# Altium PCB BAILEY.PcbDoc (part 4 of 8)
Units mil, origin at the board's own origin, x right, y up, seen from the top; angles counter-clockwise.
Board outline 4500 x 4000 mil, 4 copper layers (Signal Layer 1, Signal Layer 2, Signal Layer 3, Signal Layer 4), stack 59.904 mil thick; 190 components, 117 nets, 664 pads, 291 vias.
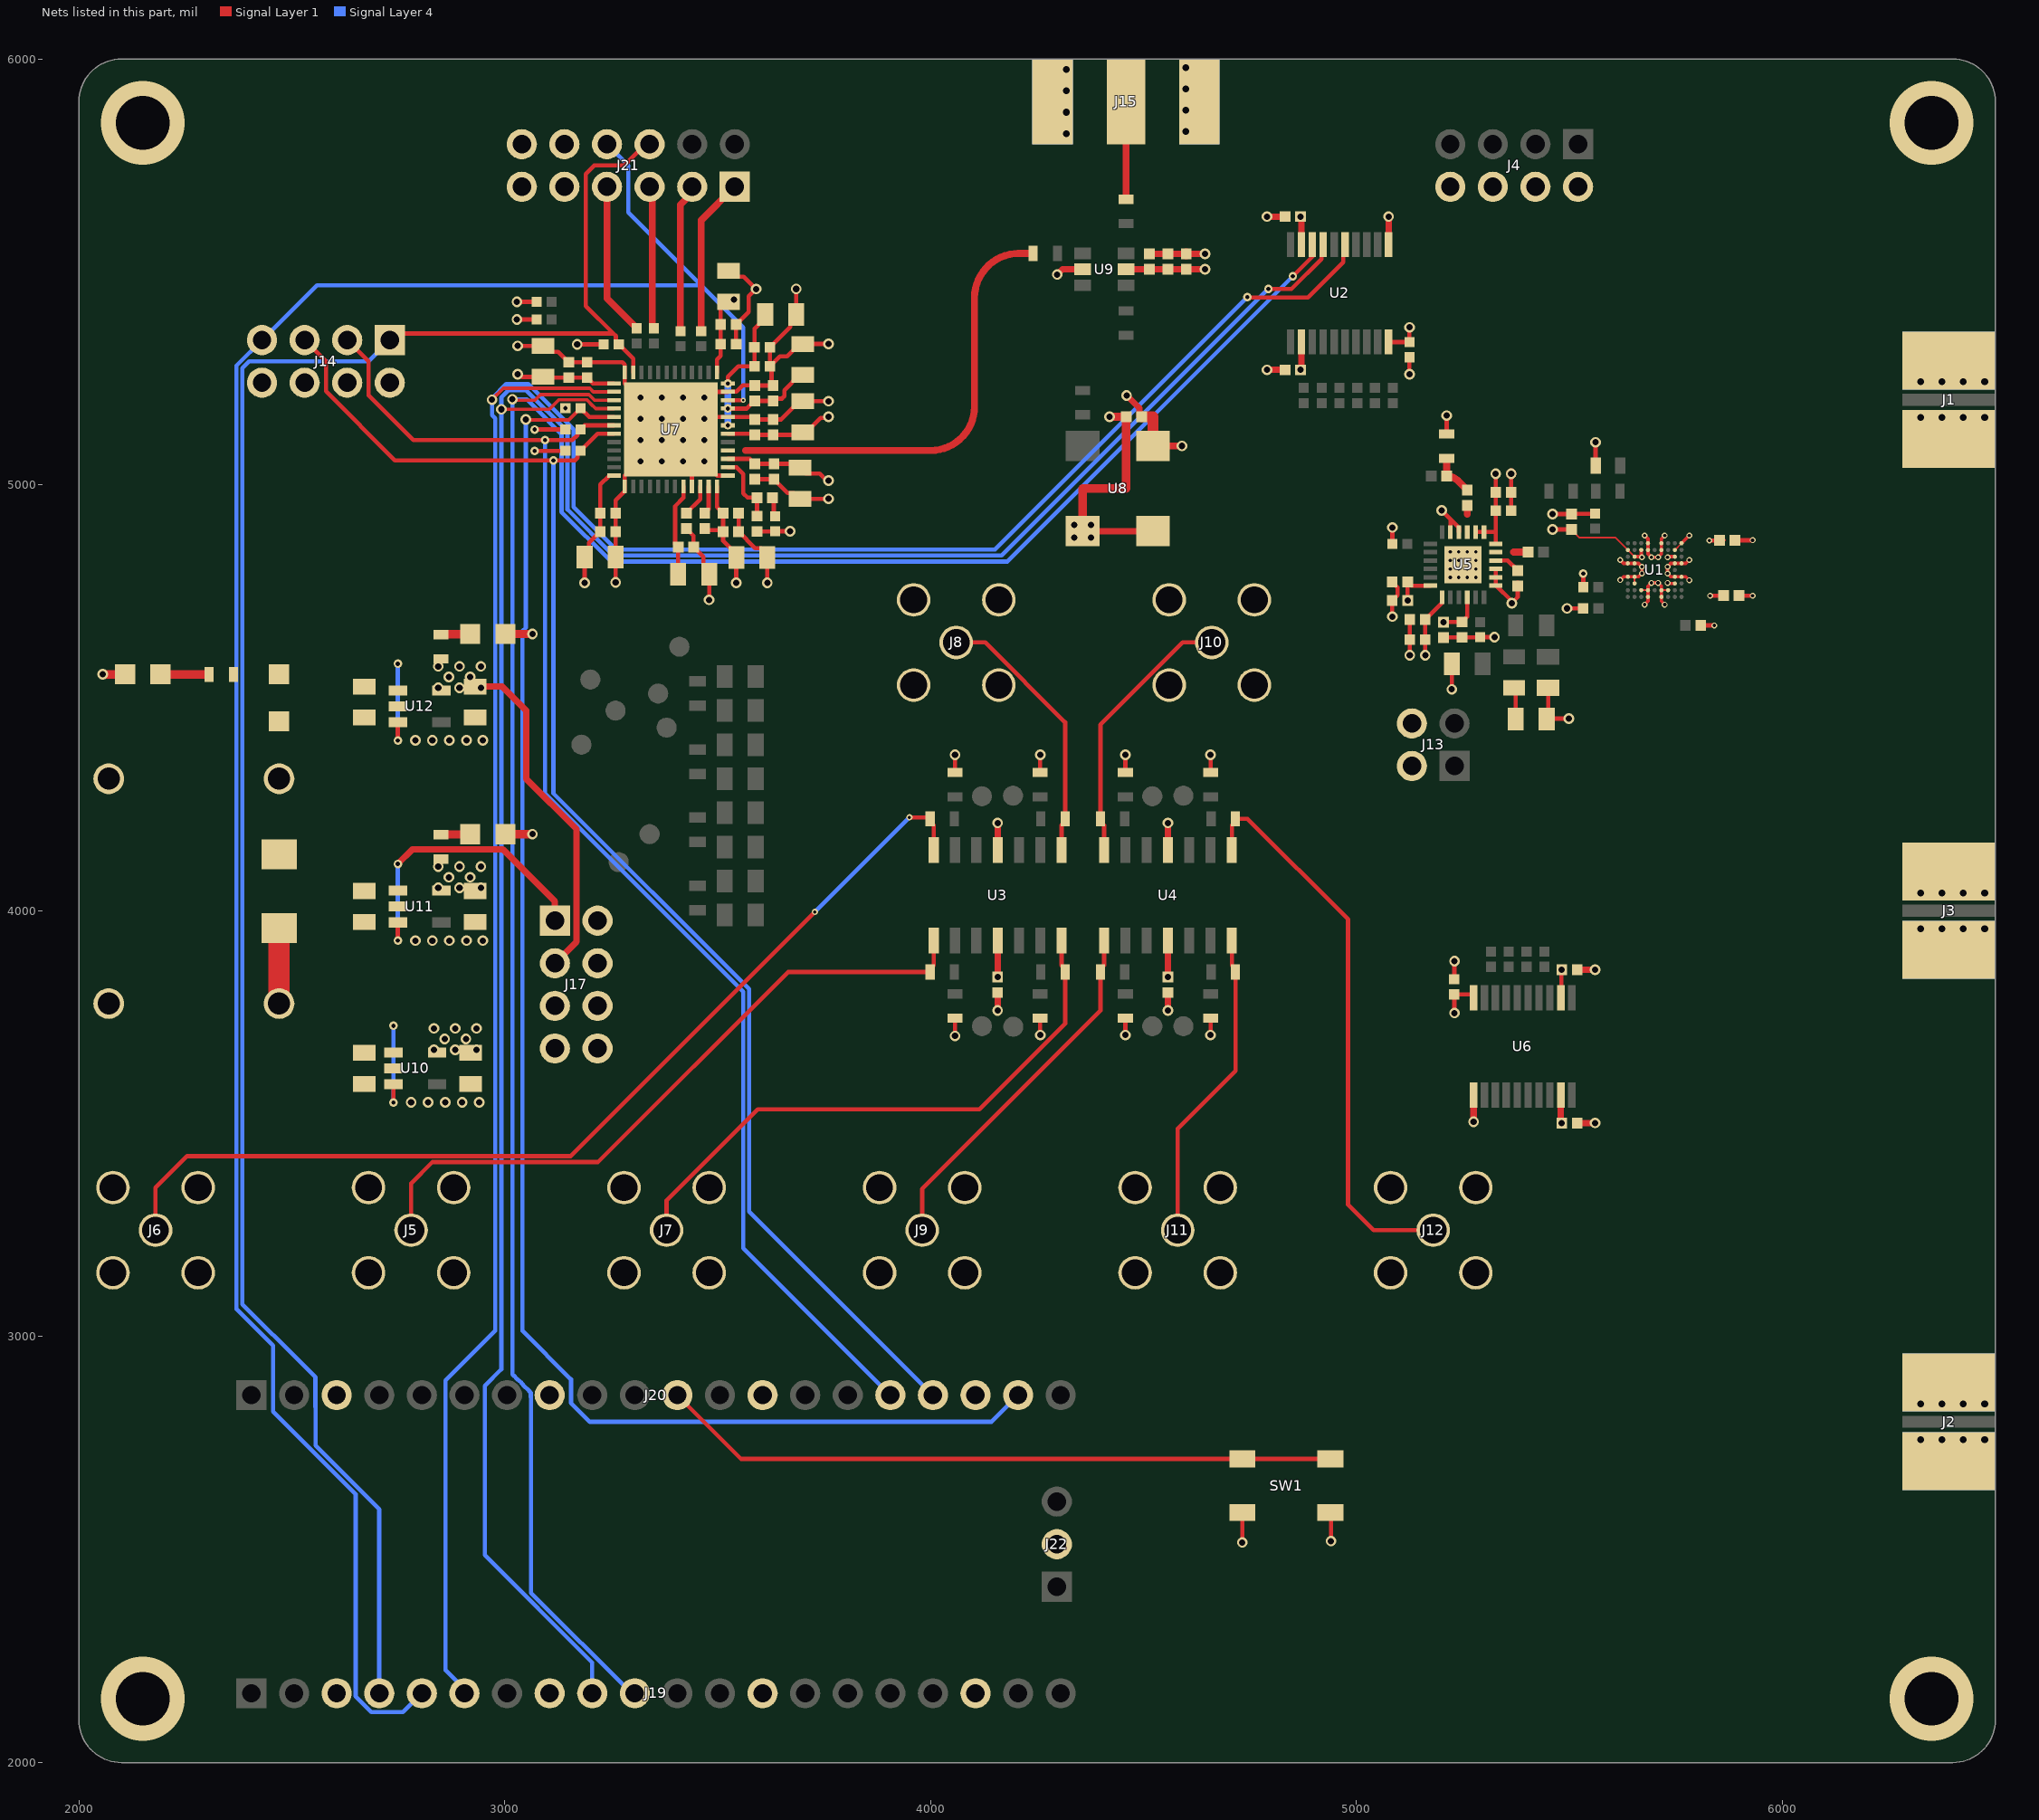
[diagram p4: the nets of this part, all layers, seen from the top]

## Part data (continued)
J21: library part CONN_2x6_2.54mm_PinHeader_Horizontal, "Conn Unshrouded Header HDR 12 POS 2.54mm Solder RA Top Entry Thru-Hole Bag", Contact Resistance=20mΩ, Current Rating=3A, Insulation Resistance=5GΩ, Manufacturer="Adam Tech", Manufacturer Part Number=PH2RA-12-UA, Max Operating Temperature=105°C, Min Operating Temperature=-40°C, Supplier Part Number=2057-PH2RA-12-UA-ND, Category="Card Edge Connectors", ComponentLink1Description=https://datasheet.octopart.com:443/PH2RA-12-UA-Adam-Tech-datasheet-21182894.pdf?src-supplier=IHS, ComponentLink1URL=https://datasheet.octopart.com:443/PH2RA-12-UA-Adam-Tech-datasheet-21182894.pdf?src-supplier=IHS, ComponentLink2Description=http://sigma.octopart.com:80/reach_statement/Adam-Tech-company-23.pdf?src-supplier=Compliance+Statements, ComponentLink2URL=http://sigma.octopart.com:80/reach_statement/Adam-Tech-company-23.pdf?src-supplier=Compliance+Statements, ComponentLink3Description=http://sigma.octopart.com:80/rohs_statement/Adam-Tech-company-22.pdf?src-supplier=Compliance+Statements, ComponentLink3URL=http://sigma.octopart.com:80/rohs_statement/Adam-Tech-company-22.pdf?src-supplier=Compliance+Statements, Contact Gender=Male, Contact Material=Brass, Export Control Classification Number (ECCN) Code=EAR99, Harmonized Tariff Schedule (HTS) Code=8536.69.40.40, Introduction Date=2012-01-13, Lifecycle Status=Production, Number of Rows=2, Pins=12, Pricing="1=0.27, 10=0.229, 100=0.1945, 500=0.17358, 1000=0.16528, 5000=0.14753, 10000=0.14049 (USD)", REACH SVHC=Yes, RoHS=Compliant, Row Spacing=2.54mm, Schedule B="8536694040, 8536694040|8536694040|8536694040|8536694040|8536694040", Stock=5214, Supplier=DigiKey, Terminal Pitch=2.54mm
J22: library part CONN_1x3_2.54mm_PinSocket_Vertical, "Btb Conn, Rcpt, 3Pos, 1Row, 2.54Mm Rohs Compliant: Yes", Contact Resistance=20mΩ, Current Rating=3A, Insulation Resistance=1GΩ, Manufacturer="Wurth Elektronik", Manufacturer Part Number=61300311821, Max Operating Temperature=105°C, Min Operating Temperature=-40°C, Operating Supply Voltage=250V, Supplier Part Number=732-61300311821-ND, Category=Uncategorized, ComponentLink1Description=https://datasheet.octopart.com:443/61300311821-Wurth-Elektronik-datasheet-182028583.pdf?src-supplier=Wurth+Elektronik, ComponentLink1URL=https://datasheet.octopart.com:443/61300311821-Wurth-Elektronik-datasheet-182028583.pdf?src-supplier=Wurth+Elektronik, ComponentLink2Description=https://datasheet.octopart.com:443/61300311821-W%C3%BCrth-Elektronik-datasheet-62127820.pdf?src-supplier=Wurth+Elektronik, ComponentLink2URL=https://datasheet.octopart.com:443/61300311821-W%C3%BCrth-Elektronik-datasheet-62127820.pdf?src-supplier=Wurth+Elektronik, Contact Plating=Gold, Gender=Female, Insulation Material=PBT, Lead Pitch=2.54mm, Length=8.12mm, Orientation=Vertical, Pins=3, Pitch=2.54mm, Pricing="1=0.32, 10=0.303, 100=0.2916, 250=0.27992, 500=0.2673 (USD)", RoHS=Compliant, Stock=1715, Supplier=DigiKey
R1 R2 R28 R41 R42 R43 R44 R46: library part RES, "Res Thick Film 0402 10K Ohm 1% 0.063W(1/16W) ±100ppm/C Pad SMD T/R", Case Code (Imperial)=0402, Manufacturer=Yageo, Manufacturer Part Number=RC0402FR-0710KL, Max Operating Temperature=155°C, Min Operating Temperature=-55°C, Power Dissipation=62.5mW, Power Rating=63mW, Supplier Part Number=311-10.0KLRCT-ND, Temperature Coefficient=100ppm/°C, Tolerance=1%, Voltage Rating=50V, Case Code (Metric)=0402, Case/Package=0402, Category="Chip SMD Resistors", China RoHS=Non-Compliant, ComponentLink1Description=https://datasheet.octopart.com:443/RC0402FR-0710KL-Yageo-datasheet-175887523.pdf?src-supplier=Newark, ComponentLink1URL=https://datasheet.octopart.com:443/RC0402FR-0710KL-Yageo-datasheet-175887523.pdf?src-supplier=Newark, ComponentLink2Description=https://datasheet.octopart.com:443/RC0402FR-0710KL-Yageo-datasheet-12531192.pdf?src-supplier=Newark, ComponentLink2URL=https://datasheet.octopart.com:443/RC0402FR-0710KL-Yageo-datasheet-12531192.pdf?src-supplier=Newark, ComponentLink3Description=https://datasheet.octopart.com:443/RC0402FR-0710KL-Yageo-datasheet-8324527.pdf?src-supplier=Newark, ComponentLink3URL=https://datasheet.octopart.com:443/RC0402FR-0710KL-Yageo-datasheet-8324527.pdf?src-supplier=Newark, ComponentLink4Description=https://datasheet.octopart.com:443/RC0402FR-0710KL-Yageo-datasheet-10408619.pdf?src-supplier=element14+APAC, ComponentLink4URL=https://datasheet.octopart.com:443/RC0402FR-0710KL-Yageo-datasheet-10408619.pdf?src-supplier=element14+APAC, ComponentLink5Description=https://datasheet.octopart.com:443/RC0402FR-0710KL-Yageo-datasheet-62067350.pdf?src-supplier=element14+APAC, ComponentLink5URL=https://datasheet.octopart.com:443/RC0402FR-0710KL-Yageo-datasheet-62067350.pdf?src-supplier=element14+APAC, ComponentLink6Description=https://datasheet.octopart.com:443/RC0402FR-0710KL-Yageo-datasheet-21426659.pdf?src-supplier=element14+APAC, ComponentLink6URL=https://datasheet.octopart.com:443/RC0402FR-0710KL-Yageo-datasheet-21426659.pdf?src-supplier=element14+APAC, ComponentLink7Description=https://datasheet.octopart.com:443/RC0402FR-0710KL-Yageo-datasheet-164759695.pdf?src-supplier=Upverter, ComponentLink7URL=https://datasheet.octopart.com:443/RC0402FR-0710KL-Yageo-datasheet-164759695.pdf?src-supplier=Upverter, ComponentLink8Description=https://datasheet.octopart.com:443/RC0402FR-0710KL-Yageo-datasheet-103092701.pdf?src-supplier=Upverter, ComponentLink8URL=https://datasheet.octopart.com:443/RC0402FR-0710KL-Yageo-datasheet-103092701.pdf?src-supplier=Upverter, ComponentLink9Description=https://sigma.octopart.com:443/138820526/technical_drawing/Yageo-RC0402FR-0710KL.pdf?src-supplier=Upverter, ComponentLink9URL=https://sigma.octopart.com:443/138820526/technical_drawing/Yageo-RC0402FR-0710KL.pdf?src-supplier=Upverter, ComponentLink10Description=https://datasheet.octopart.com:443/RC0402FR-0710KL-Yageo-datasheet-98239111.pdf?src-supplier=Upverter, ComponentLink10URL=https://datasheet.octopart.com:443/RC0402FR-0710KL-Yageo-datasheet-98239111.pdf?src-supplier=Upverter, ComponentLink11Description=https://datasheet.octopart.com:443/RC0402FR-0710KL-Yageo-datasheet-68298067.pdf?src-supplier=Upverter, ComponentLink11URL=https://datasheet.octopart.com:443/RC0402FR-0710KL-Yageo-datasheet-68298067.pdf?src-supplier=Upverter, ComponentLink12Description=https://datasheet.octopart.com:443/RC0402FR-0710KL-Yageo-datasheet-68297981.pdf?src-supplier=Upverter, ComponentLink12URL=https://datasheet.octopart.com:443/RC0402FR-0710KL-Yageo-datasheet-68297981.pdf?src-supplier=Upverter, ComponentLink13Description=https://datasheet.octopart.com:443/RC0402FR-0710KL-Yageo-datasheet-141435361.pdf?src-supplier=Upverter, ComponentLink13URL=https://datasheet.octopart.com:443/RC0402FR-0710KL-Yageo-datasheet-141435361.pdf?src-supplier=Upverter, ComponentLink14Description=https://datasheet.octopart.com:443/RC0402FR-0710KL-Yageo-datasheet-12509768.pdf?src-supplier=Upverter, ComponentLink14URL=https://datasheet.octopart.com:443/RC0402FR-0710KL-Yageo-datasheet-12509768.pdf?src-supplier=Upverter, ComponentLink15Description=https://datasheet.octopart.com:443/RC0402FR-0710KL-Yageo-Group-datasheet-190305687.pdf?src-supplier=Future+Electronics, ComponentLink15URL=https://datasheet.octopart.com:443/RC0402FR-0710KL-Yageo-Group-datasheet-190305687.pdf?src-supplier=Future+Electronics, ComponentLink16Description=https://datasheet.octopart.com:443/RC0402FR-0710KL-Yageo-datasheet-137700087.pdf?src-supplier=Future+Electronics, ComponentLink16URL=https://datasheet.octopart.com:443/RC0402FR-0710KL-Yageo-datasheet-137700087.pdf?src-supplier=Future+Electronics, ComponentLink17Description=https://datasheet.octopart.com:443/RC0402FR-0710KL-Yageo-datasheet-8324255.pdf?src-supplier=Future+Electronics, ComponentLink17URL=https://datasheet.octopart.com:443/RC0402FR-0710KL-Yageo-datasheet-8324255.pdf?src-supplier=Future+Electronics, ComponentLink18Description=https://datasheet.octopart.com:443/RC0402FR-0710KL-Yageo-datasheet-8329306.pdf?src-supplier=element14, ComponentLink18URL=https://datasheet.octopart.com:443/RC0402FR-0710KL-Yageo-datasheet-8329306.pdf?src-supplier=element14, ComponentLink19Description=https://datasheet.octopart.com:443/RC0402FR-0710KL-Yageo-datasheet-505231.pdf?src-supplier=element14, ComponentLink19URL=https://datasheet.octopart.com:443/RC0402FR-0710KL-Yageo-datasheet-505231.pdf?src-supplier=element14, ComponentLink20Description=https://datasheet.octopart.com:443/RC0402FR-0710KL-Yageo-datasheet-175423674.pdf?src-supplier=SOS+electronic, ComponentLink20URL=https://datasheet.octopart.com:443/RC0402FR-0710KL-Yageo-datasheet-175423674.pdf?src-supplier=SOS+electronic, ComponentLink21Description=https://datasheet.octopart.com:443/RC0402FR-0710KL-Yageo-datasheet-79472498.pdf?src-supplier=Megastar, ComponentLink21URL=https://datasheet.octopart.com:443/RC0402FR-0710KL-Yageo-datasheet-79472498.pdf?src-supplier=Megastar, ComponentLink22Description=https://datasheet.octopart.com/RC0402FR-0710KL-Yageo-datasheet-73766026.pdf, ComponentLink22URL=https://datasheet.octopart.com/RC0402FR-0710KL-Yageo-datasheet-73766026.pdf, ComponentLink23Description=http://sigma.octopart.com:80/conflict_mineral_statement/Yageo-company-3.pdf?src-supplier=Compliance+Statements, ComponentLink23URL=http://sigma.octopart.com:80/conflict_mineral_statement/Yageo-company-3.pdf?src-supplier=Compliance+Statements, ComponentLink24Description=http://sigma.octopart.com:80/rohs_statement/Yageo-company-2.pdf?src-supplier=Compliance+Statements, ComponentLink24URL=http://sigma.octopart.com:80/rohs_statement/Yageo-company-2.pdf?src-supplier=Compliance+Statements, Composition="Thick Film", Country of Origin="Mainland China, Taiwan", Depth=500µm, Export Control Classification Number (ECCN) Code=EAR99, Harmonized Tariff Schedule (HTS) Code=8533.21.00.30, Height=350µm, Introduction Date=2004-10-04, Lead Free="Lead Free", Lead Pitch=200µm, Length=1mm, Lifecycle Status=Production, Military Standard=Not, Mounting Technology="Surface Mount", Number of Terminals=2, Number of Terminations=2, Package Size=0402, Packaging="Tape & Reel", Pins=2, Pricing="1=0.1, 10=0.012, 25=0.0092, 50=0.0062, 100=0.0056, 250=0.00472, 500=0.00328, 10000=0.00204, 20000=0.00153 (USD)", REACH SVHC=Yes, RoHS=Compliant, Schedule B="8533210045, 8533210045|8533210045|8533210045|8533210045|8533210045|8533210045|8533210045|8533210045|8533210045|8533210045|8533210045|8533210045|8533210045|8533210045, 8533210045|8533210045|8533210045|8533210045|8533210045|8533210045|8533210045|8533210045|8533210045|8533210045|8533210045|8533210045|8533210045|8533210045|8533210045, 8533210045|8533210045|8533210045|8533210045|8533210045|8533210045|8533210045|8533210045|8533210045|8533210045|8533210045|8533210045|8533210045|8533210045|8533210045|8533210045", Stock=9059080, Supplier=DigiKey, Termination=SMD/SMT, Voltage Rating (DC)=50V, Width=500µm, Working Voltage=50V
R3: library part RES, "GENERAL PURPOSE CHIP RESISTOR Metal Glaze/thick Film, 0.1W, 0ohm, Surface Mount, 0603", Case Code (Imperial)=0603, Manufacturer=Yageo, Manufacturer Part Number=RC0603JR-070RL, Max Operating Temperature=155°C, Min Operating Temperature=-55°C, Power Dissipation=100mW, Supplier Part Number=311-0.0GRCT-ND, Temperature Coefficient=200ppm/°C, Voltage Rating (DC)=50V, Case/Package=0603, Category="Chip SMD Resistors", China RoHS=Non-Compliant, ComponentLink1Description=https://datasheet.octopart.com:443/RC0603JR-070RL-Yageo-datasheet-182189538.pdf?src-supplier=IHS, ComponentLink1URL=https://datasheet.octopart.com:443/RC0603JR-070RL-Yageo-datasheet-182189538.pdf?src-supplier=IHS, ComponentLink2Description=https://datasheet.octopart.com:443/RC0603JR-070RL-Yageo-datasheet-8328172.pdf?src-supplier=element14+APAC, ComponentLink2URL=https://datasheet.octopart.com:443/RC0603JR-070RL-Yageo-datasheet-8328172.pdf?src-supplier=element14+APAC, ComponentLink3Description=https://datasheet.octopart.com:443/RC0603JR-070RL-Yageo-datasheet-17842380.pdf?src-supplier=element14+APAC, ComponentLink3URL=https://datasheet.octopart.com:443/RC0603JR-070RL-Yageo-datasheet-17842380.pdf?src-supplier=element14+APAC, ComponentLink4Description=https://datasheet.octopart.com:443/RC0603JR-070RL-Yageo-Group-datasheet-190305687.pdf?src-supplier=Newark, ComponentLink4URL=https://datasheet.octopart.com:443/RC0603JR-070RL-Yageo-Group-datasheet-190305687.pdf?src-supplier=Newark, ComponentLink5Description=https://datasheet.octopart.com:443/RC0603JR-070RL-Yageo-datasheet-12596169.pdf?src-supplier=Newark, ComponentLink5URL=https://datasheet.octopart.com:443/RC0603JR-070RL-Yageo-datasheet-12596169.pdf?src-supplier=Newark, ComponentLink6Description=https://datasheet.octopart.com:443/RC0603JR-070RL-Yageo-datasheet-34211833.pdf?src-supplier=Newark, ComponentLink6URL=https://datasheet.octopart.com:443/RC0603JR-070RL-Yageo-datasheet-34211833.pdf?src-supplier=Newark, ComponentLink7Description=https://datasheet.octopart.com:443/RC0603JR-070RL-Yageo-datasheet-62067350.pdf?src-supplier=Farnell, ComponentLink7URL=https://datasheet.octopart.com:443/RC0603JR-070RL-Yageo-datasheet-62067350.pdf?src-supplier=Farnell, ComponentLink8Description=https://datasheet.octopart.com:443/RC0603JR-070RL-Yageo-datasheet-15599030.pdf?src-supplier=Future+Electronics, ComponentLink8URL=https://datasheet.octopart.com:443/RC0603JR-070RL-Yageo-datasheet-15599030.pdf?src-supplier=Future+Electronics, ComponentLink9Description=https://datasheet.octopart.com:443/RC0603JR-070RL-Yageo-Group-datasheet-176638170.pdf?src-supplier=Future+Electronics, ComponentLink9URL=https://datasheet.octopart.com:443/RC0603JR-070RL-Yageo-Group-datasheet-176638170.pdf?src-supplier=Future+Electronics, ComponentLink10Description=https://datasheet.octopart.com:443/RC0603JR-070RL-Yageo-datasheet-164759695.pdf?src-supplier=Future+Electronics, ComponentLink10URL=https://datasheet.octopart.com:443/RC0603JR-070RL-Yageo-datasheet-164759695.pdf?src-supplier=Future+Electronics, ComponentLink11Description=https://datasheet.octopart.com:443/RC0603JR-070RL-Yageo-datasheet-137700087.pdf?src-supplier=Future+Electronics, ComponentLink11URL=https://datasheet.octopart.com:443/RC0603JR-070RL-Yageo-datasheet-137700087.pdf?src-supplier=Future+Electronics, ComponentLink12Description=https://datasheet.octopart.com:443/RC0603JR-070RL-Yageo-datasheet-27584510.pdf?src-supplier=Future+Electronics, ComponentLink12URL=https://datasheet.octopart.com:443/RC0603JR-070RL-Yageo-datasheet-27584510.pdf?src-supplier=Future+Electronics, ComponentLink13Description=https://datasheet.octopart.com:443/RC0603JR-070RL-Yageo-datasheet-503470.pdf?src-supplier=Future+Electronics, ComponentLink13URL=https://datasheet.octopart.com:443/RC0603JR-070RL-Yageo-datasheet-503470.pdf?src-supplier=Future+Electronics, ComponentLink14Description=https://datasheet.octopart.com:443/RC0603JR-070RL-Yageo-datasheet-79472498.pdf?src-supplier=Megastar, ComponentLink14URL=https://datasheet.octopart.com:443/RC0603JR-070RL-Yageo-datasheet-79472498.pdf?src-supplier=Megastar, ComponentLink15Description=https://datasheet.octopart.com/RC0603JR-070RL-Yageo-datasheet-73766026.pdf, ComponentLink15URL=https://datasheet.octopart.com/RC0603JR-070RL-Yageo-datasheet-73766026.pdf, ComponentLink16Description=https://datasheet.octopart.com:443/RC0603JR-070RL-Yageo-datasheet-5393049.pdf?src-supplier=element14, ComponentLink16URL=https://datasheet.octopart.com:443/RC0603JR-070RL-Yageo-datasheet-5393049.pdf?src-supplier=element14, ComponentLink17Description=https://datasheet.octopart.com:443/RC0603JR-070RL-Yageo-datasheet-118562.pdf?src-supplier=DigiKey, ComponentLink17URL=https://datasheet.octopart.com:443/RC0603JR-070RL-Yageo-datasheet-118562.pdf?src-supplier=DigiKey, ComponentLink18Description=http://sigma.octopart.com:80/conflict_mineral_statement/Yageo-company-3.pdf?src-supplier=Compliance+Statements, ComponentLink18URL=http://sigma.octopart.com:80/conflict_mineral_statement/Yageo-company-3.pdf?src-supplier=Compliance+Statements, ComponentLink19Description=http://sigma.octopart.com:80/rohs_statement/Yageo-company-2.pdf?src-supplier=Compliance+Statements, ComponentLink19URL=http://sigma.octopart.com:80/rohs_statement/Yageo-company-2.pdf?src-supplier=Compliance+Statements, Composition="Thick Film", Contact Plating=Tin, Country of Origin="Mainland China, Taiwan", Depth=800µm, Export Control Classification Number (ECCN) Code=EAR99, Harmonized Tariff Schedule (HTS) Code=8533.21.00.30, Height=450µm, Introduction Date=2001-06-08, Lead Free="Lead Free", Length=1.6mm, Lifecycle Status=Production, Military Standard=Not, Mounting Technology="Surface Mount", Number of Terminals=2, Package Size=0603, Packaging="Cut Tape", Pins=2, Power Rating=100mW, Pricing="1=0.1, 10=0.010, 25=0.008, 50=0.0068, 100=0.0059, 250=0.00496, 500=0.00436, 1000=0.00384 (USD)", Radiation Hardening=No, REACH SVHC=Yes, RoHS=Compliant, Stock=4611171, Supplier=DigiKey, Termination=SMD/SMT, Width=800µm
R4 R14 R15 R16 R17 R22 R23 R24 R25: library part RES, "Resistor SMD Generic", Package Size=0603
R5 R6 R7 R8 R9 R10 R33 R34 R35 R36: library part RES, "Res Thick Film 0402 100 Ohm 1% 0.063W(1/16W) ±100ppm/C Pad SMD T/R", Case Code (Imperial)=0402, Manufacturer=Yageo, Manufacturer Part Number=RC0402FR-07100RL, Max Operating Temperature=155°C, Min Operating Temperature=-55°C, Power Dissipation=62.5mW, Power Rating=63mW, Supplier Part Number=311-100LRCT-ND, Temperature Coefficient=100ppm/°C, Tolerance=1%, Voltage Rating=50V, Case/Package=0402, Category="Chip SMD Resistors", China RoHS=Non-Compliant, ComponentLink1Description=https://datasheet.octopart.com:443/RC0402FR-07100RL-Yageo-datasheet-175887523.pdf?src-supplier=Newark, ComponentLink1URL=https://datasheet.octopart.com:443/RC0402FR-07100RL-Yageo-datasheet-175887523.pdf?src-supplier=Newark, ComponentLink2Description=https://datasheet.octopart.com:443/RC0402FR-07100RL-Yageo-datasheet-8324527.pdf?src-supplier=Newark, ComponentLink2URL=https://datasheet.octopart.com:443/RC0402FR-07100RL-Yageo-datasheet-8324527.pdf?src-supplier=Newark, ComponentLink3Description=https://datasheet.octopart.com:443/RC0402FR-07100RL-Yageo-datasheet-12531192.pdf?src-supplier=Newark, ComponentLink3URL=https://datasheet.octopart.com:443/RC0402FR-07100RL-Yageo-datasheet-12531192.pdf?src-supplier=Newark, ComponentLink4Description=https://datasheet.octopart.com:443/RC0402FR-07100RL-Yageo-datasheet-103092701.pdf?src-supplier=Upverter, ComponentLink4URL=https://datasheet.octopart.com:443/RC0402FR-07100RL-Yageo-datasheet-103092701.pdf?src-supplier=Upverter, ComponentLink5Description=https://datasheet.octopart.com:443/RC0402FR-07100RL-Yageo-Group-datasheet-190305687.pdf?src-supplier=Future+Electronics, ComponentLink5URL=https://datasheet.octopart.com:443/RC0402FR-07100RL-Yageo-Group-datasheet-190305687.pdf?src-supplier=Future+Electronics, ComponentLink6Description=https://datasheet.octopart.com:443/RC0402FR-07100RL-Yageo-datasheet-164759695.pdf?src-supplier=Future+Electronics, ComponentLink6URL=https://datasheet.octopart.com:443/RC0402FR-07100RL-Yageo-datasheet-164759695.pdf?src-supplier=Future+Electronics, ComponentLink7Description=https://datasheet.octopart.com:443/RC0402FR-07100RL-Yageo-datasheet-137700087.pdf?src-supplier=Future+Electronics, ComponentLink7URL=https://datasheet.octopart.com:443/RC0402FR-07100RL-Yageo-datasheet-137700087.pdf?src-supplier=Future+Electronics, ComponentLink8Description=https://datasheet.octopart.com:443/RC0402FR-07100RL-Yageo-datasheet-8324255.pdf?src-supplier=Future+Electronics, ComponentLink8URL=https://datasheet.octopart.com:443/RC0402FR-07100RL-Yageo-datasheet-8324255.pdf?src-supplier=Future+Electronics, ComponentLink9Description=https://datasheet.octopart.com:443/RC0402FR-07100RL-Yageo-datasheet-10408619.pdf?src-supplier=element14+APAC, ComponentLink9URL=https://datasheet.octopart.com:443/RC0402FR-07100RL-Yageo-datasheet-10408619.pdf?src-supplier=element14+APAC, ComponentLink10Description=https://datasheet.octopart.com:443/RC0402FR-07100RL-Yageo-datasheet-21426659.pdf?src-supplier=element14+APAC, ComponentLink10URL=https://datasheet.octopart.com:443/RC0402FR-07100RL-Yageo-datasheet-21426659.pdf?src-supplier=element14+APAC, ComponentLink11Description=https://datasheet.octopart.com:443/RC0402FR-07100RL-Yageo-datasheet-62067350.pdf?src-supplier=Farnell, ComponentLink11URL=https://datasheet.octopart.com:443/RC0402FR-07100RL-Yageo-datasheet-62067350.pdf?src-supplier=Farnell, ComponentLink12Description=https://datasheet.octopart.com:443/RC0402FR-07100RL-Yageo-datasheet-8329306.pdf?src-supplier=element14, ComponentLink12URL=https://datasheet.octopart.com:443/RC0402FR-07100RL-Yageo-datasheet-8329306.pdf?src-supplier=element14, ComponentLink13Description=https://datasheet.octopart.com:443/RC0402FR-07100RL-Yageo-datasheet-505231.pdf?src-supplier=element14, ComponentLink13URL=https://datasheet.octopart.com:443/RC0402FR-07100RL-Yageo-datasheet-505231.pdf?src-supplier=element14, ComponentLink14Description=https://datasheet.octopart.com:443/RC0402FR-07100RL-Yageo-datasheet-175423674.pdf?src-supplier=SOS+electronic, ComponentLink14URL=https://datasheet.octopart.com:443/RC0402FR-07100RL-Yageo-datasheet-175423674.pdf?src-supplier=SOS+electronic, ComponentLink15Description=https://datasheet.octopart.com:443/RC0402FR-07100RL-Yageo-datasheet-79472498.pdf?src-supplier=Megastar, ComponentLink15URL=https://datasheet.octopart.com:443/RC0402FR-07100RL-Yageo-datasheet-79472498.pdf?src-supplier=Megastar, ComponentLink16Description=https://datasheet.octopart.com/RC0402FR-07100RL-Yageo-datasheet-73766026.pdf, ComponentLink16URL=https://datasheet.octopart.com/RC0402FR-07100RL-Yageo-datasheet-73766026.pdf, ComponentLink17Description=http://sigma.octopart.com:80/conflict_mineral_statement/Yageo-company-3.pdf?src-supplier=Compliance+Statements, ComponentLink17URL=http://sigma.octopart.com:80/conflict_mineral_statement/Yageo-company-3.pdf?src-supplier=Compliance+Statements, ComponentLink18Description=http://sigma.octopart.com:80/rohs_statement/Yageo-company-2.pdf?src-supplier=Compliance+Statements, ComponentLink18URL=http://sigma.octopart.com:80/rohs_statement/Yageo-company-2.pdf?src-supplier=Compliance+Statements, Composition="Thick Film", Country of Origin="Mainland China, Taiwan", Depth=500µm, Export Control Classification Number (ECCN) Code=EAR99, Harmonized Tariff Schedule (HTS) Code=8533.21.00.30, Height=350µm, Introduction Date=2004-10-04, Lead Free="Lead Free", Length=1mm, Lifecycle Status=Production, Military Standard=Not, Mounting Technology="Surface Mount", Number of Terminals=2, Package Size=0402, Packaging="Tape & Reel", Pins=2, Pricing="1=0.1, 10=0.004, 25=0.0032, 10000=0.00306, 20000=0.002, 30000=0.00196, 50000=0.00182, 70000=0.00181 (USD)", REACH SVHC=Yes, RoHS=Compliant, Schedule B="8533210045, 8533210045|8533210045|8533210045|8533210045|8533210045|8533210045|8533210045|8533210045|8533210045|8533210045|8533210045|8533210045|8533210045|8533210045|8533210045|8533210045, 8533210045|8533210045|8533210045|8533210045|8533210045|8533210045|8533210045|8533210045|8533210045|8533210045|8533210045|8533210045|8533210045|8533210045|8533210045|8533210045|8533210045, 8533210045|8533210045|8533210045|8533210045|8533210045|8533210045|8533210045|8533210045|8533210045|8533210045|8533210045|8533210045|8533210045|8533210045|8533210045|8533210045|8533210045|8533210045", Stock=4299406, Supplier=DigiKey, Termination=SMD/SMT, Voltage Rating (DC)=50V, Width=500µm, Working Voltage=50V
R11 R37: library part RES, "Res Thick Film 0402 10K Ohm 1% 0.063W(1/16W) ±100ppm/C Pad SMD T/R", Case Code (Imperial)=0402, Manufacturer=Yageo, Manufacturer Part Number=RC0402FR-0710KL, Max Operating Temperature=155°C, Min Operating Temperature=-55°C, Power Dissipation=62.5mW, Power Rating=63mW, Supplier Part Number=311-10.0KLRCT-ND, Temperature Coefficient=100ppm/°C, Tolerance=1%, Voltage Rating (DC)=50V, Case Code (Metric)=0402, Case/Package=0402, Category="Chip SMD Resistors", China RoHS=Non-Compliant, ComponentLink1Description=https://datasheet.octopart.com:443/RC0402FR-0710KL-Yageo-datasheet-175887523.pdf?src-supplier=Newark, ComponentLink1URL=https://datasheet.octopart.com:443/RC0402FR-0710KL-Yageo-datasheet-175887523.pdf?src-supplier=Newark, ComponentLink2Description=https://datasheet.octopart.com:443/RC0402FR-0710KL-Yageo-datasheet-12531192.pdf?src-supplier=Newark, ComponentLink2URL=https://datasheet.octopart.com:443/RC0402FR-0710KL-Yageo-datasheet-12531192.pdf?src-supplier=Newark, ComponentLink3Description=https://datasheet.octopart.com:443/RC0402FR-0710KL-Yageo-datasheet-8324527.pdf?src-supplier=Newark, ComponentLink3URL=https://datasheet.octopart.com:443/RC0402FR-0710KL-Yageo-datasheet-8324527.pdf?src-supplier=Newark, ComponentLink4Description=https://datasheet.octopart.com:443/RC0402FR-0710KL-Yageo-datasheet-10408619.pdf?src-supplier=element14+APAC, ComponentLink4URL=https://datasheet.octopart.com:443/RC0402FR-0710KL-Yageo-datasheet-10408619.pdf?src-supplier=element14+APAC, ComponentLink5Description=https://datasheet.octopart.com:443/RC0402FR-0710KL-Yageo-datasheet-62067350.pdf?src-supplier=element14+APAC, ComponentLink5URL=https://datasheet.octopart.com:443/RC0402FR-0710KL-Yageo-datasheet-62067350.pdf?src-supplier=element14+APAC, ComponentLink6Description=https://datasheet.octopart.com:443/RC0402FR-0710KL-Yageo-datasheet-21426659.pdf?src-supplier=element14+APAC, ComponentLink6URL=https://datasheet.octopart.com:443/RC0402FR-0710KL-Yageo-datasheet-21426659.pdf?src-supplier=element14+APAC, ComponentLink7Description=https://datasheet.octopart.com:443/RC0402FR-0710KL-Yageo-datasheet-164759695.pdf?src-supplier=Upverter, ComponentLink7URL=https://datasheet.octopart.com:443/RC0402FR-0710KL-Yageo-datasheet-164759695.pdf?src-supplier=Upverter, ComponentLink8Description=https://datasheet.octopart.com:443/RC0402FR-0710KL-Yageo-datasheet-103092701.pdf?src-supplier=Upverter, ComponentLink8URL=https://datasheet.octopart.com:443/RC0402FR-0710KL-Yageo-datasheet-103092701.pdf?src-supplier=Upverter, ComponentLink9Description=https://sigma.octopart.com:443/138820526/technical_drawing/Yageo-RC0402FR-0710KL.pdf?src-supplier=Upverter, ComponentLink9URL=https://sigma.octopart.com:443/138820526/technical_drawing/Yageo-RC0402FR-0710KL.pdf?src-supplier=Upverter, ComponentLink10Description=https://datasheet.octopart.com:443/RC0402FR-0710KL-Yageo-datasheet-98239111.pdf?src-supplier=Upverter, ComponentLink10URL=https://datasheet.octopart.com:443/RC0402FR-0710KL-Yageo-datasheet-98239111.pdf?src-supplier=Upverter, ComponentLink11Description=https://datasheet.octopart.com:443/RC0402FR-0710KL-Yageo-datasheet-68298067.pdf?src-supplier=Upverter, ComponentLink11URL=https://datasheet.octopart.com:443/RC0402FR-0710KL-Yageo-datasheet-68298067.pdf?src-supplier=Upverter, ComponentLink12Description=https://datasheet.octopart.com:443/RC0402FR-0710KL-Yageo-datasheet-68297981.pdf?src-supplier=Upverter, ComponentLink12URL=https://datasheet.octopart.com:443/RC0402FR-0710KL-Yageo-datasheet-68297981.pdf?src-supplier=Upverter, ComponentLink13Description=https://datasheet.octopart.com:443/RC0402FR-0710KL-Yageo-datasheet-141435361.pdf?src-supplier=Upverter, ComponentLink13URL=https://datasheet.octopart.com:443/RC0402FR-0710KL-Yageo-datasheet-141435361.pdf?src-supplier=Upverter, ComponentLink14Description=https://datasheet.octopart.com:443/RC0402FR-0710KL-Yageo-datasheet-12509768.pdf?src-supplier=Upverter, ComponentLink14URL=https://datasheet.octopart.com:443/RC0402FR-0710KL-Yageo-datasheet-12509768.pdf?src-supplier=Upverter, ComponentLink15Description=https://datasheet.octopart.com:443/RC0402FR-0710KL-Yageo-Group-datasheet-190305687.pdf?src-supplier=Future+Electronics, ComponentLink15URL=https://datasheet.octopart.com:443/RC0402FR-0710KL-Yageo-Group-datasheet-190305687.pdf?src-supplier=Future+Electronics, ComponentLink16Description=https://datasheet.octopart.com:443/RC0402FR-0710KL-Yageo-datasheet-137700087.pdf?src-supplier=Future+Electronics, ComponentLink16URL=https://datasheet.octopart.com:443/RC0402FR-0710KL-Yageo-datasheet-137700087.pdf?src-supplier=Future+Electronics, ComponentLink17Description=https://datasheet.octopart.com:443/RC0402FR-0710KL-Yageo-datasheet-8324255.pdf?src-supplier=Future+Electronics, ComponentLink17URL=https://datasheet.octopart.com:443/RC0402FR-0710KL-Yageo-datasheet-8324255.pdf?src-supplier=Future+Electronics, ComponentLink18Description=https://datasheet.octopart.com:443/RC0402FR-0710KL-Yageo-datasheet-8329306.pdf?src-supplier=element14, ComponentLink18URL=https://datasheet.octopart.com:443/RC0402FR-0710KL-Yageo-datasheet-8329306.pdf?src-supplier=element14, ComponentLink19Description=https://datasheet.octopart.com:443/RC0402FR-0710KL-Yageo-datasheet-505231.pdf?src-supplier=element14, ComponentLink19URL=https://datasheet.octopart.com:443/RC0402FR-0710KL-Yageo-datasheet-505231.pdf?src-supplier=element14, ComponentLink20Description=https://datasheet.octopart.com:443/RC0402FR-0710KL-Yageo-datasheet-175423674.pdf?src-supplier=SOS+electronic, ComponentLink20URL=https://datasheet.octopart.com:443/RC0402FR-0710KL-Yageo-datasheet-175423674.pdf?src-supplier=SOS+electronic, ComponentLink21Description=https://datasheet.octopart.com:443/RC0402FR-0710KL-Yageo-datasheet-79472498.pdf?src-supplier=Megastar, ComponentLink21URL=https://datasheet.octopart.com:443/RC0402FR-0710KL-Yageo-datasheet-79472498.pdf?src-supplier=Megastar, ComponentLink22Description=https://datasheet.octopart.com/RC0402FR-0710KL-Yageo-datasheet-73766026.pdf, ComponentLink22URL=https://datasheet.octopart.com/RC0402FR-0710KL-Yageo-datasheet-73766026.pdf, ComponentLink23Description=http://sigma.octopart.com:80/conflict_mineral_statement/Yageo-company-3.pdf?src-supplier=Compliance+Statements, ComponentLink23URL=http://sigma.octopart.com:80/conflict_mineral_statement/Yageo-company-3.pdf?src-supplier=Compliance+Statements, ComponentLink24Description=http://sigma.octopart.com:80/rohs_statement/Yageo-company-2.pdf?src-supplier=Compliance+Statements, ComponentLink24URL=http://sigma.octopart.com:80/rohs_statement/Yageo-company-2.pdf?src-supplier=Compliance+Statements, Composition="Thick Film", Country of Origin="Mainland China, Taiwan", Depth=500µm, Export Control Classification Number (ECCN) Code=EAR99, Harmonized Tariff Schedule (HTS) Code=8533.21.00.30, Height=350µm, Introduction Date=2004-10-04, Lead Free="Lead Free", Lead Pitch=200µm, Length=1mm, Lifecycle Status=Production, Military Standard=Not, Mounting Technology="Surface Mount", Number of Terminals=2, Number of Terminations=2, Package Size=0402, Packaging="Tape & Reel", Pins=2, Pricing="1=0.1, 10=0.012, 25=0.0092, 50=0.0062, 100=0.0056, 250=0.00472, 500=0.00328, 10000=0.00204, 20000=0.00153 (USD)", REACH SVHC=Yes, RoHS=Compliant, Schedule B="8533210045, 8533210045|8533210045|8533210045|8533210045|8533210045|8533210045|8533210045|8533210045|8533210045|8533210045|8533210045|8533210045|8533210045|8533210045, 8533210045|8533210045|8533210045|8533210045|8533210045|8533210045|8533210045|8533210045|8533210045|8533210045|8533210045|8533210045|8533210045|8533210045|8533210045, 8533210045|8533210045|8533210045|8533210045|8533210045|8533210045|8533210045|8533210045|8533210045|8533210045|8533210045|8533210045|8533210045|8533210045|8533210045|8533210045", Stock=9059080, Supplier=DigiKey, Termination=SMD/SMT, Width=500µm, Working Voltage=50V
R12 R13 R18 R19 R20 R21 R26 R27: library part RES, "100mW Thick Film Resistors 75V ±100ppm/℃ ±1% 200Ω 0603 Chip Resistor - Surface Mount ROHS", Case Code (Imperial)=0603, Manufacturer=Yageo, Manufacturer Lifecycle Status=ACTIVE, Manufacturer Part Number=RC0603FR-07200RL, Max Operating Temperature=155°C, Max Power Dissipation=100mW, Min Operating Temperature=-55°C, Supplier Part Number=P200DBCT-ND, Temperature Coefficient=25ppm/°C, Tolerance=1%, Voltage Rating (DC)=75V, Case/Package=0603, Category="Chip SMD Resistors", China RoHS=Non-Compliant, ComponentLink1Description=https://datasheet.octopart.com:443/ERA-3AEB201V-Panasonic-datasheet-62287448.pdf?src-supplier=Newark, ComponentLink1URL=https://datasheet.octopart.com:443/ERA-3AEB201V-Panasonic-datasheet-62287448.pdf?src-supplier=Newark, ComponentLink2Description=https://datasheet.octopart.com:443/ERA-3AEB201V-Panasonic-datasheet-136531316.pdf?src-supplier=Newark, ComponentLink2URL=https://datasheet.octopart.com:443/ERA-3AEB201V-Panasonic-datasheet-136531316.pdf?src-supplier=Newark, ComponentLink3Description=https://datasheet.octopart.com:443/ERA-3AEB201V-Panasonic-datasheet-8367715.pdf?src-supplier=element14+APAC, ComponentLink3URL=https://datasheet.octopart.com:443/ERA-3AEB201V-Panasonic-datasheet-8367715.pdf?src-supplier=element14+APAC, ComponentLink4Description=https://datasheet.octopart.com:443/ERA-3AEB201V-Panasonic-datasheet-61114971.pdf?src-supplier=element14+APAC, ComponentLink4URL=https://datasheet.octopart.com:443/ERA-3AEB201V-Panasonic-datasheet-61114971.pdf?src-supplier=element14+APAC, ComponentLink5Description=https://datasheet.octopart.com:443/ERA-3AEB201V-Panasonic-datasheet-13266200.pdf?src-supplier=_legacy+Avnet, ComponentLink5URL=https://datasheet.octopart.com:443/ERA-3AEB201V-Panasonic-datasheet-13266200.pdf?src-supplier=_legacy+Avnet, ComponentLink6Description=https://datasheet.octopart.com:443/ERA-3AEB201V-Panasonic-datasheet-118567.pdf?src-supplier=element14, ComponentLink6URL=https://datasheet.octopart.com:443/ERA-3AEB201V-Panasonic-datasheet-118567.pdf?src-supplier=element14, ComponentLink7Description=https://datasheet.octopart.com:443/ERA-3AEB201V-Panasonic-datasheet-154766165.pdf?src-supplier=Master+Electronics, ComponentLink7URL=https://datasheet.octopart.com:443/ERA-3AEB201V-Panasonic-datasheet-154766165.pdf?src-supplier=Master+Electronics, ComponentLink8Description=https://datasheet.octopart.com:443/ERA-3AEB201V-Panasonic-datasheet-12510007.pdf?src-supplier=Future+Electronics, ComponentLink8URL=https://datasheet.octopart.com:443/ERA-3AEB201V-Panasonic-datasheet-12510007.pdf?src-supplier=Future+Electronics, ComponentLink9Description=https://datasheet.octopart.com:443/ERA-3AEB201V-Panasonic-datasheet-11763931.pdf?src-supplier=Future+Electronics, ComponentLink9URL=https://datasheet.octopart.com:443/ERA-3AEB201V-Panasonic-datasheet-11763931.pdf?src-supplier=Future+Electronics, ComponentLink10Description=https://datasheet.octopart.com:443/ERA-3AEB201V-Panasonic-datasheet-10840895.pdf?src-supplier=Future+Electronics, ComponentLink10URL=https://datasheet.octopart.com:443/ERA-3AEB201V-Panasonic-datasheet-10840895.pdf?src-supplier=Future+Electronics, ComponentLink11Description=https://datasheet.octopart.com:443/ERA-3AEB201V-Panasonic-datasheet-5392808.pdf?src-supplier=Future+Electronics, ComponentLink11URL=https://datasheet.octopart.com:443/ERA-3AEB201V-Panasonic-datasheet-5392808.pdf?src-supplier=Future+Electronics, ComponentLink12Description=https://datasheet.octopart.com:443/ERA-3AEB201V-Panasonic-datasheet-46744048.pdf?src-supplier=RS+(Formerly+Allied+Electronics), ComponentLink12URL=https://datasheet.octopart.com:443/ERA-3AEB201V-Panasonic-datasheet-46744048.pdf?src-supplier=RS+(Formerly+Allied+Electronics), ComponentLink13Description=https://datasheet.octopart.com:443/ERA3AEB201V-Panasonic-datasheet-188913046.pdf?src-supplier=TME, ComponentLink13URL=https://datasheet.octopart.com:443/ERA3AEB201V-Panasonic-datasheet-188913046.pdf?src-supplier=TME, ComponentLink14Description=https://datasheet.octopart.com:443/ERA3AEB201V-Panasonic-datasheet-182736486.pdf?src-supplier=HQonline, ComponentLink14URL=https://datasheet.octopart.com:443/ERA3AEB201V-Panasonic-datasheet-182736486.pdf?src-supplier=HQonline, ComponentLink15Description=https://sigma.octopart.com:443/150570796/technical_drawing/Panasonic-ERA3AEB201V.pdf?src-supplier=Panasonic+SCT, ComponentLink15URL=https://sigma.octopart.com:443/150570796/technical_drawing/Panasonic-ERA3AEB201V.pdf?src-supplier=Panasonic+SCT, ComponentLink16Description=https://datasheet.octopart.com:443/ERA3AEB201V-Panasonic-datasheet-138783076.pdf?src-supplier=Burklin+Elektronik, ComponentLink16URL=https://datasheet.octopart.com:443/ERA3AEB201V-Panasonic-datasheet-138783076.pdf?src-supplier=Burklin+Elektronik, ComponentLink17Description=https://datasheet.octopart.com/ERA-3AEB201V-Panasonic-datasheet-78375410.pdf, ComponentLink17URL=https://datasheet.octopart.com/ERA-3AEB201V-Panasonic-datasheet-78375410.pdf, ComponentLink18Description=https://datasheet.octopart.com:443/ERA3AEB201V-Panasonic---ECG-datasheet-15994758.pdf?src-supplier=Farnell, ComponentLink18URL=https://datasheet.octopart.com:443/ERA3AEB201V-Panasonic---ECG-datasheet-15994758.pdf?src-supplier=Farnell, ComponentLink19Description=https://datasheet.octopart.com:443/ERA3AEB201V-Panasonic-datasheet-10050158.pdf?src-supplier=Arrow+Electronics, ComponentLink19URL=https://datasheet.octopart.com:443/ERA3AEB201V-Panasonic-datasheet-10050158.pdf?src-supplier=Arrow+Electronics, ComponentLink20Description=https://datasheet.octopart.com:443/ERA-3AEB201V-Panasonic-datasheet-33006989.pdf?src-supplier=Electro+Sonic, ComponentLink20URL=https://datasheet.octopart.com:443/ERA-3AEB201V-Panasonic-datasheet-33006989.pdf?src-supplier=Electro+Sonic, ComponentLink21Description=https://datasheet.octopart.com:443/RC0603FR-07200RL-Yageo-datasheet-175887523.pdf?src-supplier=IHS, ComponentLink21URL=https://datasheet.octopart.com:443/RC0603FR-07200RL-Yageo-datasheet-175887523.pdf?src-supplier=IHS, ComponentLink22Description=https://datasheet.octopart.com:443/RC0603FR-07200RL-Yageo-datasheet-103092701.pdf?src-supplier=Upverter, ComponentLink22URL=https://datasheet.octopart.com:443/RC0603FR-07200RL-Yageo-datasheet-103092701.pdf?src-supplier=Upverter, ComponentLink23Description=https://datasheet.octopart.com:443/RC0603FR-07200RL-Yageo-datasheet-8328172.pdf?src-supplier=Farnell, ComponentLink23URL=https://datasheet.octopart.com:443/RC0603FR-07200RL-Yageo-datasheet-8328172.pdf?src-supplier=Farnell, ComponentLink24Description=https://datasheet.octopart.com:443/RC0603FR-07200RL-Yageo-datasheet-62067350.pdf?src-supplier=Farnell, ComponentLink24URL=https://datasheet.octopart.com:443/RC0603FR-07200RL-Yageo-datasheet-62067350.pdf?src-supplier=Farnell, ComponentLink25Description=https://datasheet.octopart.com:443/RC0603FR-07200RL-Yageo-datasheet-34211833.pdf?src-supplier=element14+APAC, ComponentLink25URL=https://datasheet.octopart.com:443/RC0603FR-07200RL-Yageo-datasheet-34211833.pdf?src-supplier=element14+APAC, ComponentLink26Description=https://datasheet.octopart.com:443/RC0603FR-07200RL-Yageo-Group-datasheet-176638170.pdf?src-supplier=Future+Electronics, ComponentLink26URL=https://datasheet.octopart.com:443/RC0603FR-07200RL-Yageo-Group-datasheet-176638170.pdf?src-supplier=Future+Electronics, ComponentLink27Description=https://datasheet.octopart.com:443/RC0603FR-07200RL-Yageo-datasheet-164759695.pdf?src-supplier=Future+Electronics, ComponentLink27URL=https://datasheet.octopart.com:443/RC0603FR-07200RL-Yageo-datasheet-164759695.pdf?src-supplier=Future+Electronics, ComponentLink28Description=https://datasheet.octopart.com:443/RC0603FR-07200RL-Yageo-datasheet-137700087.pdf?src-supplier=Future+Electronics, ComponentLink28URL=https://datasheet.octopart.com:443/RC0603FR-07200RL-Yageo-datasheet-137700087.pdf?src-supplier=Future+Electronics, ComponentLink29Description=https://datasheet.octopart.com:443/RC0603FR-07200RL-Yageo-datasheet-15599030.pdf?src-supplier=Future+Electronics, ComponentLink29URL=https://datasheet.octopart.com:443/RC0603FR-07200RL-Yageo-datasheet-15599030.pdf?src-supplier=Future+Electronics, ComponentLink30Description=https://datasheet.octopart.com:443/RC0603FR-07200RL-Yageo-datasheet-12596169.pdf?src-supplier=Future+Electronics, ComponentLink30URL=https://datasheet.octopart.com:443/RC0603FR-07200RL-Yageo-datasheet-12596169.pdf?src-supplier=Future+Electronics, ComponentLink31Description=https://datasheet.octopart.com:443/RC0603FR-07200RL-Yageo-datasheet-8324193.pdf?src-supplier=Future+Electronics, ComponentLink31URL=https://datasheet.octopart.com:443/RC0603FR-07200RL-Yageo-datasheet-8324193.pdf?src-supplier=Future+Electronics, ComponentLink32Description=https://datasheet.octopart.com:443/RC0603FR-07200RL-Yageo-datasheet-148775077.pdf?src-supplier=TME, ComponentLink32URL=https://datasheet.octopart.com:443/RC0603FR-07200RL-Yageo-datasheet-148775077.pdf?src-supplier=TME, ComponentLink33Description=https://datasheet.octopart.com:443/RC0603FR-07200RL-Yageo-datasheet-79472498.pdf?src-supplier=Megastar, ComponentLink33URL=https://datasheet.octopart.com:443/RC0603FR-07200RL-Yageo-datasheet-79472498.pdf?src-supplier=Megastar, ComponentLink34Description=https://datasheet.octopart.com/RC0603FR-07200RL-Yageo-datasheet-73766026.pdf, ComponentLink34URL=https://datasheet.octopart.com/RC0603FR-07200RL-Yageo-datasheet-73766026.pdf, ComponentLink35Description=https://datasheet.octopart.com:443/RC0603FR-07200RL-Yageo-datasheet-118562.pdf?src-supplier=DigiKey, ComponentLink35URL=https://datasheet.octopart.com:443/RC0603FR-07200RL-Yageo-datasheet-118562.pdf?src-supplier=DigiKey, ComponentLink36Description=http://sigma.octopart.com:80/conflict_mineral_statement/Yageo-company-3.pdf?src-supplier=Compliance+Statements, ComponentLink36URL=http://sigma.octopart.com:80/conflict_mineral_statement/Yageo-company-3.pdf?src-supplier=Compliance+Statements, ComponentLink37Description=http://sigma.octopart.com:80/rohs_statement/Yageo-company-2.pdf?src-supplier=Compliance+Statements, ComponentLink37URL=http://sigma.octopart.com:80/rohs_statement/Yageo-company-2.pdf?src-supplier=Compliance+Statements, Composition="Thin Film", Contact Plating=Tin, Country of Origin=Japan, Depth=800µm, Export Control Classification Number (ECCN) Code=EAR99, Features="Automotive AEC-Q200", Harmonized Tariff Schedule (HTS) Code=8533.21.00.30, Height=450µm, Introduction Date=2008-03-19, Lead Free="Lead Free", Length=1.6mm, Lifecycle Status=Production, Military Standard=Not, Mounting Technology="Surface Mount", Number of Terminals=2, Number of Terminations=2, Package Size=0603, Packaging="Cut Tape", Part Series="Thin Film Chip Resistors, High Reliability Type", Pins=2, Power Dissipation=100mW, Power Rating=100mW, Pricing="1=0.1, 10=0.061, 25=0.0568, 50=0.0536, 100=0.0506, 250=0.04692, 500=0.04438, 1000=0.04206 (USD)", Radiation Hardening=No, REACH SVHC=Yes, RoHS=Compliant, Schedule B="8533210045, 8533210045|8533210045, 8533210045|8533210045|8533210045, 8533210045|8533210045|8533210045|8533210045|8533210045|8533210045|8533210045|8533210045|8533210045|8533210045|8533210045|8533210045|8533210045|8533210045|8533210045|8533210045|8533210045|8533210045|8533210045|8533210045|8533210045|8533210045|8533210045|85", Stock=33785, Supplier=DigiKey, Termination=SMD/SMT, Width=800µm, Working Voltage=75V
R29: library part RES, "100mW Thin Film Resistor 75V ±0.1% ±25ppm/℃ 49.9Ω 0603 Chip Resistor - Surface Mount ROHS", Case Code (Imperial)=0603, Case Code (Metric)=1608, Manufacturer=Panasonic, Manufacturer Lifecycle Status=ACTIVE, Manufacturer Part Number=ERA-3AEB49R9V, Max Operating Temperature=155°C, Max Power Dissipation=100mW, Min Operating Temperature=-55°C, Supplier Part Number=P49.9DBCT-ND, Temperature Coefficient=25ppm/°C, Tolerance=0.1%, Voltage Rating=75V, Case/Package=0603, Category="Chip SMD Resistors", ComponentLink1Description=https://datasheet.octopart.com:443/ERA3AEB49R9V-Panasonic-datasheet-181959660.pdf?src-supplier=IHS, ComponentLink1URL=https://datasheet.octopart.com:443/ERA3AEB49R9V-Panasonic-datasheet-181959660.pdf?src-supplier=IHS, ComponentLink2Description=https://sigma.octopart.com:443/138766958/technical_drawing/Panasonic-ERA-3AEB49R9V.pdf?src-supplier=Upverter, ComponentLink2URL=https://sigma.octopart.com:443/138766958/technical_drawing/Panasonic-ERA-3AEB49R9V.pdf?src-supplier=Upverter, ComponentLink3Description=https://datasheet.octopart.com:443/ERA3AEB49R9V-Panasonic-datasheet-62287448.pdf?src-supplier=Newark, ComponentLink3URL=https://datasheet.octopart.com:443/ERA3AEB49R9V-Panasonic-datasheet-62287448.pdf?src-supplier=Newark, ComponentLink4Description=https://datasheet.octopart.com:443/ERA3AEB49R9V-Panasonic-datasheet-136531316.pdf?src-supplier=Newark, ComponentLink4URL=https://datasheet.octopart.com:443/ERA3AEB49R9V-Panasonic-datasheet-136531316.pdf?src-supplier=Newark, ComponentLink5Description=https://datasheet.octopart.com:443/ERA3AEB49R9V-Panasonic-datasheet-8367715.pdf?src-supplier=Future+Electronics, ComponentLink5URL=https://datasheet.octopart.com:443/ERA3AEB49R9V-Panasonic-datasheet-8367715.pdf?src-supplier=Future+Electronics, ComponentLink6Description=https://datasheet.octopart.com:443/ERA3AEB49R9V-Panasonic-datasheet-61114971.pdf?src-supplier=Future+Electronics, ComponentLink6URL=https://datasheet.octopart.com:443/ERA3AEB49R9V-Panasonic-datasheet-61114971.pdf?src-supplier=Future+Electronics, ComponentLink7Description=https://datasheet.octopart.com:443/ERA3AEB49R9V-Panasonic-datasheet-12510007.pdf?src-supplier=Future+Electronics, ComponentLink7URL=https://datasheet.octopart.com:443/ERA3AEB49R9V-Panasonic-datasheet-12510007.pdf?src-supplier=Future+Electronics, ComponentLink8Description=https://datasheet.octopart.com:443/ERA3AEB49R9V-Panasonic-datasheet-11763931.pdf?src-supplier=Future+Electronics, ComponentLink8URL=https://datasheet.octopart.com:443/ERA3AEB49R9V-Panasonic-datasheet-11763931.pdf?src-supplier=Future+Electronics, ComponentLink9Description=https://datasheet.octopart.com:443/ERA3AEB49R9V-Panasonic-datasheet-10840895.pdf?src-supplier=Future+Electronics, ComponentLink9URL=https://datasheet.octopart.com:443/ERA3AEB49R9V-Panasonic-datasheet-10840895.pdf?src-supplier=Future+Electronics, ComponentLink10Description=https://datasheet.octopart.com:443/ERA3AEB49R9V-Panasonic-datasheet-5392808.pdf?src-supplier=Future+Electronics, ComponentLink10URL=https://datasheet.octopart.com:443/ERA3AEB49R9V-Panasonic-datasheet-5392808.pdf?src-supplier=Future+Electronics, ComponentLink11Description=https://datasheet.octopart.com:443/ERA3AEB49R9V-Panasonic-datasheet-13266200.pdf?src-supplier=RS+(Formerly+Allied+Electronics), ComponentLink11URL=https://datasheet.octopart.com:443/ERA3AEB49R9V-Panasonic-datasheet-13266200.pdf?src-supplier=RS+(Formerly+Allied+Electronics), ComponentLink12Description=https://datasheet.octopart.com:443/ERA-3AEB49R9V-Panasonic-datasheet-46744048.pdf?src-supplier=RS+(Formerly+Allied+Electronics), ComponentLink12URL=https://datasheet.octopart.com:443/ERA-3AEB49R9V-Panasonic-datasheet-46744048.pdf?src-supplier=RS+(Formerly+Allied+Electronics), ComponentLink13Description=https://datasheet.octopart.com:443/ERA-3AEB49R9V-Panasonic-datasheet-154766165.pdf?src-supplier=Master+Electronics, ComponentLink13URL=https://datasheet.octopart.com:443/ERA-3AEB49R9V-Panasonic-datasheet-154766165.pdf?src-supplier=Master+Electronics, ComponentLink14Description=https://datasheet.octopart.com:443/ERA3AEB49R9V-Panasonic-datasheet-188913046.pdf?src-supplier=TME, ComponentLink14URL=https://datasheet.octopart.com:443/ERA3AEB49R9V-Panasonic-datasheet-188913046.pdf?src-supplier=TME, ComponentLink15Description=https://sigma.octopart.com:443/150570796/technical_drawing/Panasonic-ERA3AEB49R9V.pdf?src-supplier=Panasonic+SCT, ComponentLink15URL=https://sigma.octopart.com:443/150570796/technical_drawing/Panasonic-ERA3AEB49R9V.pdf?src-supplier=Panasonic+SCT, ComponentLink16Description=https://datasheet.octopart.com:443/ERA3AEB49R9V-Panasonic-datasheet-138783076.pdf?src-supplier=Burklin+Elektronik, ComponentLink16URL=https://datasheet.octopart.com:443/ERA3AEB49R9V-Panasonic-datasheet-138783076.pdf?src-supplier=Burklin+Elektronik, ComponentLink17Description=https://datasheet.octopart.com/ERA3AEB49R9V-Panasonic-datasheet-78375410.pdf, ComponentLink17URL=https://datasheet.octopart.com/ERA3AEB49R9V-Panasonic-datasheet-78375410.pdf, ComponentLink18Description=https://datasheet.octopart.com:443/ERA3AEB49R9V-Panasonic---ECG-datasheet-15994758.pdf?src-supplier=Farnell, ComponentLink18URL=https://datasheet.octopart.com:443/ERA3AEB49R9V-Panasonic---ECG-datasheet-15994758.pdf?src-supplier=Farnell, ComponentLink19Description=https://datasheet.octopart.com:443/ERA3AEB49R9V-Panasonic-datasheet-33006989.pdf?src-supplier=Electro+Sonic, ComponentLink19URL=https://datasheet.octopart.com:443/ERA3AEB49R9V-Panasonic-datasheet-33006989.pdf?src-supplier=Electro+Sonic, Composition="Metal Film", Contact Plating=Tin, Depth=800µm, Features="Automotive AEC-Q200", Height=450µm, Lead Free="Lead Free", Length=1.6mm, Lifecycle Status=Production, Military Standard=Not, Mounting Technology="Surface Mount", Number of Terminals=2, Number of Terminations=2, Package Size=0603, Packaging="Cut Tape", Part Series="Thin Film Chip Resistors, High Reliability Type", Pins=2, Power Dissipation=100mW, Power Rating=100mW, Pricing="1=0.1, 10=0.061, 25=0.0568, 50=0.0536, 100=0.0506, 250=0.04692, 500=0.04438, 1000=0.04206 (USD)", Radiation Hardening=No, REACH SVHC=Yes, RoHS=Compliant, Schedule B="8533210045, 8533210045|8533210045, 8533210045|8533210045|8533210045, 8533210045|8533210045|8533210045|8533210045", Stock=52555, Supplier=DigiKey, Termination=SMD/SMT, Voltage Rating (DC)=75V, Width=800µm, Working Voltage=75V